# Altium PCB QS30.PcbDoc (part 2 of 2)
Units mil, origin at the board's own origin, x right, y up, seen from the top; angles counter-clockwise.
Board outline 3448.82 x 1825 mil, 2 copper layers (Top Layer, Bottom Layer); 106 components, 114 nets, 350 pads, 148 vias.
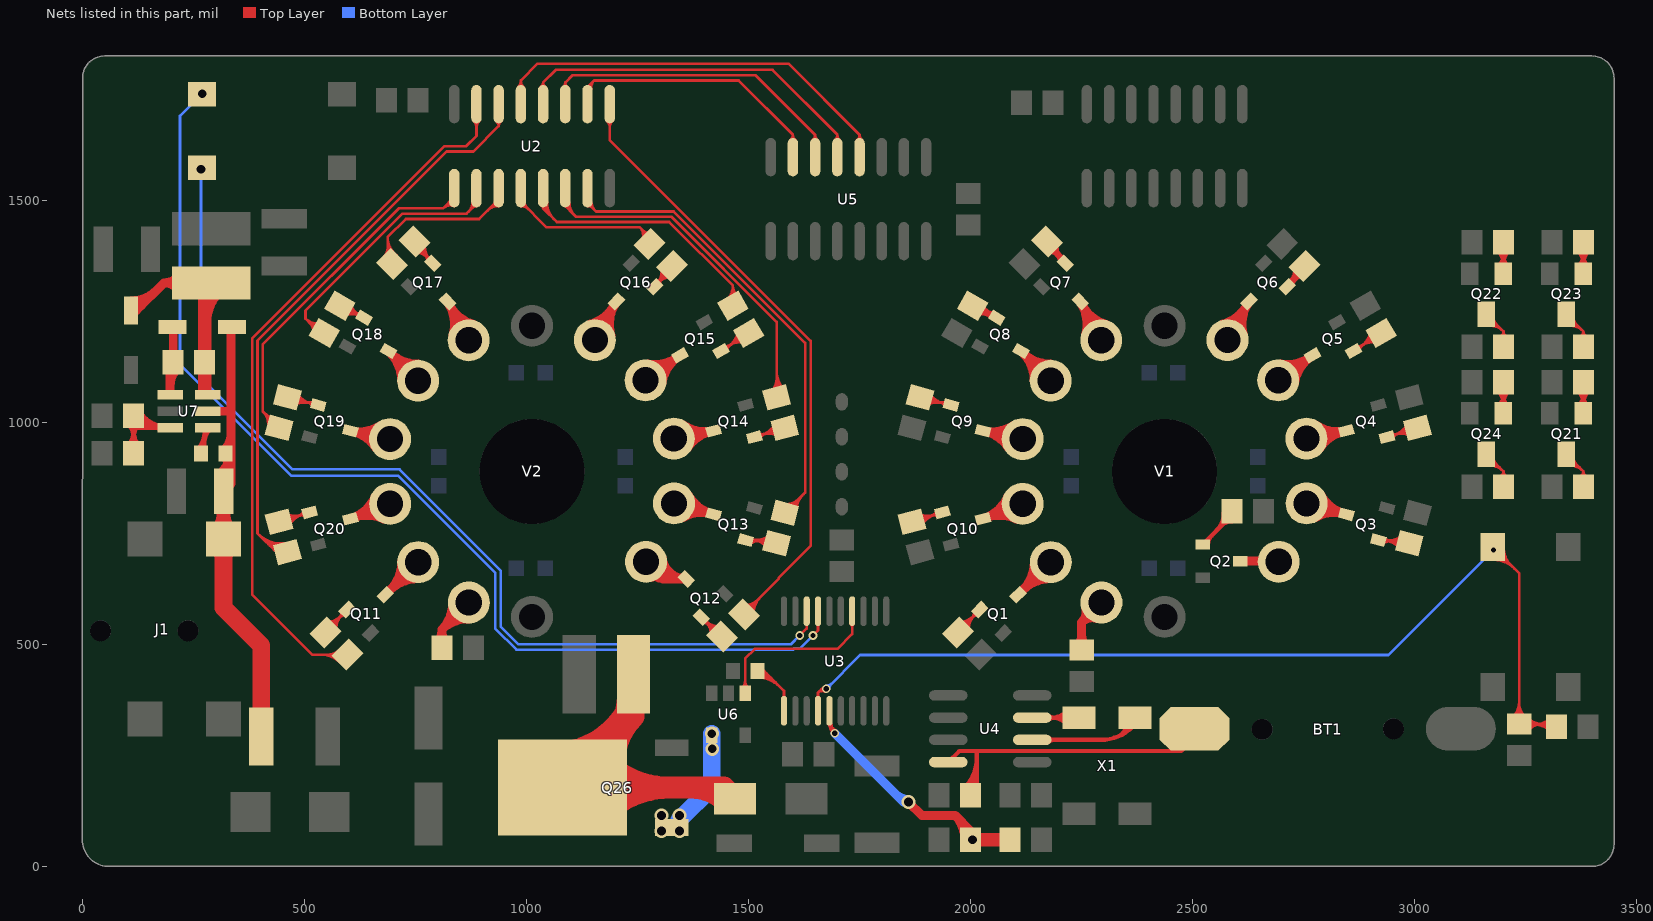
[diagram p2: the nets of this part, all layers, seen from the top]

## Via types
v1: diameter 31.5, hole 19.68, Top Layer to Bottom Layer, tented both sides, 87 vias
v2: diameter 19.68, hole 19.68, Top Layer to Bottom Layer, 32 vias
v3: diameter 19.68, hole 11.81, Top Layer to Bottom Layer, tented both sides, 25 vias
v4: diameter 196.85, hole 137.8, Top Layer to Bottom Layer, 4 vias

## Nets (pads, with @x,y where several pads share a name; then routed paths per layer and width w, separated by ;. In a path a pad name is that pad's centre, name@x,y a point inside that pad or via, vN(x,y) a via of type N, cw(c..) or ccw(c..) an arc to the next point about the centre after c; other vN are vias at no path point) (continued)
N2_0: R13.2 U2.15 | length 1772.1
  Top Layer w6: 538.13,476.83 cw(c538.13,417.54) R13.2@580.05,459.47 ; 551.57,476.83 ccw(c551.57,517.12) R13.2@580.05,488.63 ; 552.61,476.83 cw(c552.61,432.03) R13.2@584.29,463.71 ; R13.2@566.05,476.83 ccw(c566.05,502.63) R13.2@584.29,484.39 ; R13.2@567.1,476.83 cw(c567.1,446.51) R13.2@588.54,467.95 ; R13.2@597.42,476.83 517.42,476.83 382.36,611.89 382.36,1188.86 815.39,1621.89 864.36,1621.89 887.36,1644.89 887.36,1671.89 ; U2.15@881.13,1678.65 cw(c866.09,1663.61) 887.36,1663.61 cw(c908.63,1663.61) U2.15@893.59,1678.65 ; U2.15@884.1,1676.7 cw(c882.19,1671.89) 887.36,1671.89 ; U2.15@890.62,1676.7 ccw(c892.53,1671.89) 887.36,1671.89
N2_1: R14.2 U2.9 | length 1596.3
  Top Layer w6: U2.9@1181.13,1678.65 cw(c1166.09,1663.61) 1187.36,1663.61 cw(c1208.63,1663.61) U2.9@1193.59,1678.65 ; U2.9@1187.36,1716.38 1187.36,1635.83 1639.88,1183.31 1639.88,721.85 1567.72,649.69 1567.72,647.72 1489.88,569.88 R14.2@1489.88,557.52 ; R14.2@1489.94,582.2 ccw(c1489.94,611.8) 1510.87,590.87 ; R14.2@1489.94,588.2 ccw(c1489.94,632.28) 1521.11,601.11 ; R14.2@1498.56,567.57 cw(c1525.08,567.57) 1506.33,586.33 ; R14.2@1504.56,567.57 cw(c1545.56,567.57) 1516.57,596.57 ; R14.2@1510.56,567.57 cw(c1566.05,567.57) 1526.81,606.81
N2_2: R15.2 U2.7 | length 1248.3
  Top Layer w6: U2.7@1137.36,1487.09 cw(c1137.36,1470.69) 1148.96,1482.29 ; U2.7@1137.36,1527.4 1137.36,1493.89 1156.36,1474.89 1331.33,1474.89 1627.36,1178.86 1627.36,841.94 R15.2@1581.53,796.12 ; U2.7@1146.17,1495.91 ccw(c1172.31,1495.91) 1153.83,1477.42 ; R15.2@1585.34,809.72 ccw(c1585.34,833.38) 1602.07,816.65 ; R15.2@1585.34,815.72 ccw(c1585.34,853.86) 1612.31,826.89 ; R15.2@1593.96,795.1 cw(c1626.41,795.1) 1603.46,818.05 ; R15.2@1599.96,795.1 cw(c1646.9,795.1) 1613.71,828.29 ; R15.2@1605.96,795.1 cw(c1667.38,795.1) 1623.95,838.53
N2_3: R16.2 U2.6 | length 1010.8
  Top Layer w6: U2.6@1087.36,1527.4 1087.36,1486.89 1111.36,1462.89 1326.36,1462.89 1563.19,1226.06 R16.2@1563.19,1056.12 ; U2.6@1090.17,1495.91 ccw(c1118.73,1495.91) 1098.54,1475.72 ; U2.6@1096.17,1495.91 ccw(c1139.21,1495.91) 1108.78,1465.47 ; R16.2@1552.41,1071.72 ccw(c1526.39,1097.74) 1563.19,1097.74 ; R16.2@1556.65,1067.47 ccw(c1540.87,1083.25) 1563.19,1083.25 ; 1563.19,1087.13 ccw(c1596.99,1087.13) R16.2@1573.09,1063.23 ; 1563.19,1101.62 ccw(c1611.48,1101.62) R16.2@1577.33,1067.47 ; 1563.19,1116.1 ccw(c1625.96,1116.1) R16.2@1581.58,1071.72
N2_4: R17.2 U2.5 | length 803.8
  Top Layer w6: U2.5@1033.54,1487.97 cw(c1030.62,1481.89) 1037.36,1481.89 ; U2.5@1034.17,1495.91 ccw(c1060.31,1495.91) 1041.83,1477.42 ; U2.5@1037.36,1527.4 1037.36,1481.89 ; U2.5@1040.17,1495.91 ccw(c1080.8,1495.91) 1052.07,1467.18 ; U2.5@1041.18,1487.97 ccw(c1044.1,1481.89) 1037.36,1481.89 ; U2.5@1046.17,1495.91 ccw(c1101.28,1495.91) 1062.31,1456.94 ; R17.2@1453.47,1279.13 ccw(c1426.5,1306.1) 1464.65,1306.1 ; R17.2@1457.72,1274.88 ccw(c1440.99,1291.61) 1464.65,1291.61 ; R17.2@1464.65,1262.58 1464.65,1307.64 ; 1464.65,1296.88 ccw(c1488.02,1296.88) R17.2@1475.74,1276.98 ; R17.2@1478.89,1282.09 cw(c1494.67,1307.63) 1464.65,1307.63 ; 1037.36,1481.89 1068.36,1450.89 1321.39,1450.89 1464.65,1307.64
N2_5: R18.2 U2.4 | length 494.8
  Top Layer w6: U2.4@987.36,1487.09 cw(c987.36,1463.45) 1004.08,1480.17 ; U2.4@987.36,1527.4 987.36,1496.89 1045.36,1438.89 1255.36,1438.89 ; U2.4@996.17,1495.91 ccw(c1015.07,1495.91) 1001.71,1482.54 ; R18.2@1260.9,1412.28 ccw(c1237.83,1421.36) 1255.36,1438.89 ; 1260.99,1433.26 ccw(c1280.09,1452.37) R18.2@1280.09,1425.35 ; 1261.84,1432.42 cw(c1247.12,1417.7) R18.2@1266.48,1410.08 ; R18.2@1268.31,1425.94 cw(c1256.41,1414.05) R18.2@1272.07,1407.89 ; R18.2@1287.31,1406.94 1255.36,1438.89
N2_6: R19.2 U2.3 | length 555.9
  Top Layer w6: R19.2@679.94,1374.2 ccw(c662.16,1391.98) 687.31,1391.98 ; R19.2@687.31,1356.83 687.31,1416.83 ; 687.31,1392.17 ccw(c720.05,1392.17) R19.2@699.84,1366.4 ; 687.31,1404.5 ccw(c729.73,1404.5) R19.2@703.55,1371.12 ; R19.2@707.25,1375.84 cw(c739.4,1416.83) 687.31,1416.83 ; 912.1,1476.63 cw(c937.36,1451.38) U2.3@937.36,1487.09 ; 922.35,1486.88 cw(c937.36,1471.86) U2.3@937.36,1493.09 ; 926.55,1491.08 ccw(c921.73,1495.91) U2.3@928.55,1495.91 ; U2.3@937.36,1527.4 937.36,1501.89 893.36,1457.89 728.36,1457.89 687.31,1416.83
N2_7: R20.2 U2.2 | length 744.5
  Top Layer w6: 510.14,1225.7 ccw(c531.7,1247.26) R20.2@538.15,1217.46 ; 512.08,1223.77 cw(c491.49,1203.17) R20.2@520.61,1203.17 ; 517.93,1217.92 ccw(c534.47,1234.47) R20.2@539.41,1211.6 ; R20.2@534.65,1201.2 502.36,1233.49 ; R20.2@536.88,1223.33 cw(c528.94,1260.06) 502.36,1233.49 ; 869.48,1474.01 ccw(c847.58,1495.91) U2.2@878.55,1495.91 ; 879.18,1483.7 cw(c887.36,1475.52) U2.2@887.36,1487.09 ; 879.72,1484.25 ccw(c868.07,1495.91) U2.2@884.55,1495.91 ; U2.2@887.36,1527.4 887.36,1491.89 865.36,1469.89 720.36,1469.89 502.36,1251.89 502.36,1233.49
N2_8: R21.2 U2.1 | length 997.1
  Top Layer w6: 408.94,1021.92 ccw(c439.39,1052.37) R21.2@439.39,1009.3 ; 415.5,1015.35 cw(c392.75,992.6) R21.2@424.82,989.91 ; R21.2@418.84,990.41 ccw(c375.88,994.01) 406.36,1024.49 ; 419.18,1011.68 ccw(c439.39,1031.88) R21.2@439.39,1003.3 ; R21.2@443.19,987.66 406.36,1024.49 ; 819.42,1488.95 cw(c831.53,1476.84) U2.1@836.54,1493.22 ; U2.1@834.79,1487.48 ccw(c828.22,1466.03) 812.36,1481.89 ; U2.1@837.36,1486.89 U2.1@837.36,1527.4 837.36,1506.89 812.36,1481.89 ; 406.36,1024.49 406.36,1175.89 712.36,1481.89 812.36,1481.89
N2_9: R22.2 U2.14 | length 1580.3
  Top Layer w6: 403.54,740.71 ccw(c451.13,788.29) R22.2@456.55,721.22 ; 412.72,731.53 ccw(c452.5,771.31) R22.2@457.03,715.24 ; 421.9,722.36 ccw(c453.87,754.33) R22.2@457.52,709.26 ; 431.07,713.18 ccw(c455.25,737.35) R22.2@458,703.28 ; R22.2@456.07,727.2 cw(c449.75,805.27) 394.37,749.89 ; R22.2@461.53,707.66 436.59,707.66 394.36,749.89 ; U2.14@931.96,1677.92 cw(c923.4,1666.89) 937.36,1666.89 ; U2.14@937.36,1716.38 937.36,1666.89 ; U2.14@942.76,1677.92 ccw(c951.32,1666.89) 937.36,1666.89 ; 394.36,749.89 394.36,1183.89 820.36,1609.89 880.36,1609.89 937.36,1666.89
N2_A: U2.10 U5.7 | length 672.1
  Top Layer w6: U2.10@1137.36,1716.38 1137.36,1755 1151.88,1769.52 ; U2.10@1140.11,1748.45 cw(c1154.3,1751.44) 1144.05,1761.69 ; U2.10@1145.98,1749.69 cw(c1167.24,1754.16) 1151.88,1769.52 ; U5.7@1594.19,1635.23 ccw(c1583.77,1647.52) 1599.88,1647.52 ; U5.7@1599.88,1597.01 1599.88,1647.52 ; U5.7@1605.58,1635.23 cw(c1615.99,1647.52) 1599.88,1647.52 ; 1151.88,1769.52 1477.88,1769.52 1599.88,1647.52
N2_B: U2.13 U5.4 | length 1009.9
  Top Layer w6: U2.13@981.13,1754.1 ccw(c966.09,1769.15) 987.36,1769.15 ccw(c1008.63,1769.15) U2.13@993.59,1754.1 ; U2.13@987.36,1716.38 987.36,1770.04 1024.84,1807.52 1589.88,1807.52 1749.88,1647.52 ; U5.4@1744.19,1635.23 ccw(c1733.77,1647.52) 1749.88,1647.52 ; U5.4@1749.88,1597.01 1749.88,1647.52 ; U5.4@1755.58,1635.23 cw(c1765.99,1647.52) 1749.88,1647.52
N2_C: U2.12 U5.5 | length 885.2
  Top Layer w6: U2.12@1032.24,1755.04 ccw(c1025.13,1765) 1037.36,1765 ; U2.12@1037.36,1716.38 1037.36,1765 ; U2.12@1042.48,1755.04 cw(c1049.6,1765) 1037.36,1765 ; U5.5@1694.19,1635.23 ccw(c1683.77,1647.52) 1699.88,1647.52 ; U5.5@1699.88,1597.01 1699.88,1647.52 ; U5.5@1705.58,1635.23 cw(c1715.99,1647.52) 1699.88,1647.52 ; 1037.36,1765 1065.88,1793.52 1553.88,1793.52 1699.88,1647.52
N2_D: U2.11 U5.6 | length 775.2
  Top Layer w6: U2.11@1082.24,1755.04 ccw(c1075.13,1765) 1087.36,1765 ; U2.11@1087.36,1716.38 1087.36,1765 ; U2.11@1092.48,1755.04 cw(c1099.6,1765) 1087.36,1765 ; U5.6@1644.19,1635.23 ccw(c1633.77,1647.52) 1649.88,1647.52 ; U5.6@1649.88,1597.01 1649.88,1647.52 ; U5.6@1655.58,1635.23 cw(c1665.99,1647.52) 1649.88,1647.52 ; 1087.36,1765 1103.88,1781.52 1515.88,1781.52 1649.88,1647.52
NetBT1_1: BT1.1 C2.1 U4.8 | length 911.2
  Top Layer w10: U4.8@1949.76,235 1974.76,260 2474.13,260 BT1.1@2534.06,319.92 ; C2.1@1986.52,177.1 ccw(c1919.56,244.06) 2014.25,244.06 ; C2.1@1993.59,170.03 ccw(c1943.7,219.92) 2014.25,219.92 ; C2.1@1999.68,160 2014.25,174.57 2014.25,260 ; C2.1@2000.66,162.96 ccw(c1967.84,195.78) 2014.25,195.78
  Top Layer w20: U4.8@1949.76,235 U4.8@1969.25,235
NetC8_1: C8.1 D4.2 L2.1 U7.6 | length 702.4
  Top Layer w20: D4.2@110,1251.93 121.93,1251.93 183.98,1313.98 ; D4.2@110,1253.43 ccw(c110,1285.84) 132.92,1262.92 ; D4.2@110,1273.43 ccw(c110,1354.12) 167.06,1297.06 ; L2.1@216.91,1297.52 ccw(c183.98,1272.8) 183.98,1313.98 ; L2.1@216.91,1330.43 cw(c183.98,1355.15) 183.98,1313.98 ; L2.1@290,1313.98 183.98,1313.98
  Top Layer w30: U7.6@275.43,1070 275.43,1299.41 L2.1@290,1313.98 ; 275.43,1224.73 cw(c379.25,1224.73) L2.1@305.84,1298.14
NetC8_2: C8.2 D2.2 U7.1 | length 200.6
  Top Layer w20: U7.1@197.68,1062.4 197.68,1128.11 C8.2@204.57,1135 204.57,1213.5 ccw(c203.07,1213.5) D2.2@203.07,1215 ; 197.68,1081.54 cw(c254.09,1081.54) C8.2@214.2,1121.43
NetD3_1: D3.1 L1.2 Q26.4 | length 1864.1
  Top Layer w50: Q26.4@1101.07,258.97 ccw(c1061.61,444.52) L1.2@1225.9,349.67 ; Q26.4@1118.39,260.79 ccw(c1118.39,371.52) 1196.68,293.22 ; Q26.4@1150.86,184.76 cw(c1244.08,205.54) Q26.4@1176.54,273.08 ; Q26.4@1177.26,118.64 cw(c1319.41,-23.51) 1319.41,177.52 cw(c1319.41,378.55) Q26.4@1177.26,236.4 ; Q26.4@1188.69,285.23 ccw(c1092.59,381.34) L1.2@1228.5,381.34 ; Q26.4@1198.82,199.07 cw(c1369.8,244.88) 1216.5,333.39 ; Q26.4@1199.66,195.64 cw(c1349.33,229) 1240.9,337.43 ; L1.2@1240.91,432.52 1240.91,337.44 ; 1371.82,177.52 cw(c1371.82,66.98) D3.1@1449.98,145.14 ; D3.1@1469.17,152.52 1444.17,177.52 Q26.4@1080.98,177.52 1240.91,337.44
NetQ1_1: Q1.1 R3.1 | length 237.9
  Top Layer w6: R3.1@1971.72,526.94 Q1.1@2020.4,578.41 ; R3.1@1973.93,550.34 ccw(c1972.55,599.74) 2008.45,565.78 ; R3.1@1974.09,544.34 ccw(c1973.12,579.26) 1998.5,555.26 ; R3.1@1989.12,530.13 cw(c2024.78,531.13) 1998.86,555.64 ; R3.1@1995.11,530.3 cw(c2045.26,531.7) 2008.81,566.16 ; 2002.17,559.14 ccw(c1986.38,574.08) Q1.1@2008.11,574.69 ; 2002.63,559.62 cw(c2017.74,545.33) Q1.1@2017.16,566.12
NetQ1_3: Q1.3 V1.3 | length 245.4
  Top Layer w20: Q1.3@2106.7,611.82 V1.3@2180.62,685.18 ; V1.3@2143.37,685.32 cw(c2053.46,685.66) 2116.8,621.84 cw(c2180.13,558.02) V1.3@2180.47,647.93
NetQ2_1: Q2.1 R4.1 | length 221
  Top Layer w10: Q2.1@2522.56,724.92 2588.82,791.18 R4.1@2588.82,800 ; Q2.1@2534.29,724.92 cw(c2562.62,724.92) 2542.59,744.95 ; 2553.58,755.94 ccw(c2513.45,796.06) R4.1@2570.2,796.06 ; 2565.36,767.73 cw(c2588.82,744.27) R4.1@2588.82,777.44 ; R4.1@2570.65,773.01 ccw(c2547.6,796.06) R4.1@2580.2,796.06
NetQ2_3: Q2.3 V1.13 | length 87.2
  Top Layer w20: Q2.3@2607.2,687.52 2692.06,687.52 cw(c2692.06,686) V1.13@2693.58,686
NetQ3_1: Q3.1 R5.1 | length 270.2
  Top Layer w6: Q3.1@2917.97,734.81 R5.1@2987.6,727.66 ; Q3.1@2928.29,726.7 cw(c2943.4,708.13) 2945.84,731.95 ; Q3.1@2928.39,740.28 ccw(c2944.31,759.23) 2946.6,734.59 ; Q3.1@2929.51,727.91 cw(c2942.82,716.87) 2941.22,734.09 ; Q3.1@2929.56,739.1 ccw(c2943.99,750.84) 2942.09,732.33 ; Q3.1@2932.71,733.3 ccw(c2938.01,784.95) R5.1@2970.78,744.68 ; 2935.71,732.99 cw(c2930.85,685.59) R5.1@2967.8,715.67 ; 2947.12,731.82 ccw(c2950.94,769.06) R5.1@2974.57,740.02 ; 2950.12,731.51 cw(c2946.73,698.52) R5.1@2972.46,719.45
NetQ3_3: Q3.3 V1.12 | length 234
  Top Layer w20: V1.12@2756.49,817.52 Q3.3@2845.89,792.84 ; V1.12@2774.87,785.13 cw(c2819.24,706.92) 2843.17,793.6 cw(c2867.09,880.27) V1.12@2788.89,835.9
NetQ4_1: Q4.1 R6.1 | length 238.8
  Top Layer w6: Q4.1@2937.33,966.72 R6.1@3005.94,987.66 ; Q4.1@2946.23,975.77 ccw(c2955.95,994.03) 2961.99,974.24 ; Q4.1@2949.86,963.85 cw(c2969.15,953.58) 2962.77,974.48 ; 2954.25,971.88 ccw(c2939.58,1019.94) R6.1@2983.93,996.33 ; 2954.88,972.07 cw(c2969.28,924.9) R6.1@2992.45,968.44 ; 2968.1,976.11 ccw(c2957.66,1010.32) R6.1@2989.23,993.51 ; 2968.73,976.3 cw(c2978.9,942.98) R6.1@2995.27,973.74
NetQ4_3: Q4.3 V1.11 | length 232.7
  Top Layer w20: V1.11@2756.14,963.31 Q4.3@2845.89,980.94 ; V1.11@2776.91,994.23 ccw(c2827.05,1068.87) 2844.37,980.64 ccw(c2861.7,892.41) V1.11@2787.06,942.54
NetQ5_1: Q5.1 R7.1 | length 241.5
  Top Layer w6: Q5.1@2862.13,1160.66 R7.1@2924.49,1201.2 ; Q5.1@2868.21,1171.74 ccw(c2872.44,1191.68) 2883.55,1174.59 ; Q5.1@2875.01,1161.29 cw(c2896.68,1156.7) 2884.61,1175.28 ; 2879.03,1171.65 ccw(c2851.51,1213.99) R7.1@2900.91,1203.51 ; 2879.87,1172.2 cw(c2906.62,1131.05) R7.1@2916.8,1179.06 ; 2891.17,1179.55 ccw(c2871.55,1209.74) R7.1@2906.77,1202.27 ; 2892.02,1180.09 cw(c2910.87,1151.09) R7.1@2918.05,1184.93
NetQ5_3: Q5.3 V1.10 | length 237
  Top Layer w20: V1.10@2692.6,1094.53 Q5.3@2770.12,1150.73 ; V1.10@2698.46,1131.31 ccw(c2712.62,1220.1) 2765.4,1147.3 ccw(c2818.17,1074.51) V1.10@2729.38,1088.66
NetQ6_1: Q6.1 R8.1 | length 294.4
  Top Layer w6: Q6.1@2713.15,1305.37 R8.1@2751.83,1351.83 ; Q6.1@2713.58,1317.12 ccw(c2706.44,1336.51) 2725.2,1327.85 ; Q6.1@2715.82,1317.62 ccw(c2714.03,1337.28) 2729.2,1324.65 ; Q6.1@2716.91,1309.89 ccw(c2677.71,1342.53) R8.1@2728.51,1347.17 ; Q6.1@2718.02,1311.22 cw(c2755.34,1280.15) R8.1@2750.92,1328.51 ; Q6.1@2718.12,1317.53 ccw(c2721.07,1334.67) 2731.11,1320.46 ; Q6.1@2724.89,1311.9 cw(c2745.42,1319.46) 2725.56,1328.63 ; Q6.1@2725.31,1307.35 cw(c2750.09,1303.08) 2735.59,1323.63 ; Q6.1@2725.4,1309.65 cw(c2748.11,1311.73) 2730.58,1326.32 ; 2726.18,1321.03 ccw(c2698.11,1344.39) R8.1@2734.48,1347.72 ; 2727.29,1322.36 cw(c2753.48,1300.55) R8.1@2750.37,1334.49
NetQ6_3: Q6.3 V1.9 | length 240.6
  Top Layer w20: V1.9@2568.27,1221.03 ccw(c2543.73,1307.53) 2622.25,1263.72 ccw(c2700.77,1219.91) V1.9@2614.27,1195.37 ; V1.9@2578.44,1185.2 Q6.3@2626.84,1271.96
NetQ7_1: Q7.1 R9.1 | length 297.8
  Top Layer w6: R9.1@2171.83,1406.94 Q7.1@2213.29,1358.26 ; R9.1@2172.97,1383.6 cw(c2169.08,1335.05) Q7.1@2206.16,1366.63 ; R9.1@2173.44,1389.59 cw(c2170.71,1355.47) 2196.77,1377.66 ; R9.1@2189.19,1402.99 ccw(c2225.44,1400.09) 2197.75,1376.51 ; 2189.9,1378.22 cw(c2173.86,1355.7) Q7.1@2201.12,1360.28 ; R9.1@2195.17,1402.52 ccw(c2245.86,1398.46) Q7.1@2207.15,1365.48 ; 2195.7,1378.91 cw(c2178.49,1364.25) Q7.1@2201.03,1362.45 ; 2196.93,1377.47 ccw(c2212.11,1390.39) Q7.1@2210.51,1370.53 ; 2197.24,1372.99 ccw(c2205.88,1385.12) Q7.1@2208.35,1370.43 ; 2199.01,1382.18 ccw(c2220.46,1392.64) Q7.1@2212.68,1370.07 ; 2200.61,1378.88 cw(c2183.83,1370.7) Q7.1@2201.48,1364.61
NetQ7_3: Q7.3 V1.7 | length 240.5
  Top Layer w20: Q7.3@2246.7,1271.96 V1.7@2294.16,1184.75 ; V1.7@2258.44,1195.29 ccw(c2172.2,1220.75) 2251.18,1263.73 ccw(c2330.16,1306.7) V1.7@2304.7,1220.47
NetQ8_1: Q8.1 R10.1 | length 294.6
  Top Layer w6: R10.1@2004.49,1262.58 Q8.1@2058.82,1235.44 ; R10.1@2012.53,1246.74 cw(c2023.96,1212.48) 2040.1,1244.79 ; R10.1@2014.43,1241.05 cw(c2030.45,1193.05) Q8.1@2053.06,1238.32 ; R10.1@2021.77,1265.24 ccw(c2054.48,1276.16) 2039.07,1245.3 ; R10.1@2027.46,1267.14 ccw(c2073.91,1282.65) Q8.1@2052.03,1238.83 ; 2033.48,1242.32 cw(c2029.15,1221.11) Q8.1@2047.21,1233.04 ; 2033.99,1242.21 ccw(c2038.17,1262.69) Q8.1@2049.7,1245.25 ; 2034.75,1247.46 ccw(c2044.71,1267.4) Q8.1@2051.77,1246.26 ; 2036.04,1246.82 cw(c2026.99,1228.7) Q8.1@2046.2,1235.11 ; 2036.22,1252.84 ccw(c2052.54,1271.27) Q8.1@2054.03,1246.7 ; 2039.76,1249.71 cw(c2027.87,1236.29) Q8.1@2045.76,1237.37
NetQ8_3: Q8.3 V1.6 | length 235.9
  Top Layer w20: Q8.3@2113.42,1160.73 V1.6@2180.29,1093.7 ; V1.6@2143.04,1093.75 ccw(c2053.13,1093.86) 2116.78,1157.36 ccw(c2180.44,1220.86) V1.6@2180.33,1130.95
NetQ9_1: Q9.1 R11.1 | length 238.8
  Top Layer w6: R11.1@1885.94,1056.12 Q9.1@1955.57,1038.97 ; R11.1@1897.31,1042.58 cw(c1915.72,1012.15) 1924.23,1046.69 ; R11.1@1900.42,1037.45 cw(c1926.33,994.62) 1938.29,1043.22 ; R11.1@1902.26,1062.66 ccw(c1932.23,1080.79) 1923.85,1046.78 ; R11.1@1907.39,1065.77 ccw(c1949.76,1091.39) 1937.92,1043.32 ; 1929.9,1045.29 ccw(c1935.07,1066.28) Q9.1@1946.26,1047.78 ; 1930.37,1045.18 cw(c1925.37,1024.85) Q9.1@1943.28,1035.68
NetQ9_3: Q9.3 V1.5 | length 232.7
  Top Layer w20: Q9.3@2027.65,980.94 V1.5@2117.17,962.28 ; V1.5@2086.01,941.87 ccw(c2010.8,892.6) 2029.14,980.63 ccw(c2047.48,1068.65) V1.5@2096.76,993.44
NetQ10_1: Q10.1 R12.1 | length 238.8
  Top Layer w6: R12.1@1867.6,776.12 Q10.1@1936.21,797.06 ; R12.1@1878.27,790.04 ccw(c1894.64,820.8) 1904.81,787.48 ; R12.1@1881.09,795.34 ccw(c1904.26,838.88) 1918.67,791.71 ; R12.1@1884.31,770.26 cw(c1915.88,753.46) 1905.44,787.67 ; R12.1@1889.61,767.45 cw(c1933.97,743.84) 1919.29,791.9 ; 1910.77,789.3 ccw(c1904.39,810.19) Q10.1@1923.68,799.93 ; 1911.55,789.54 cw(c1917.6,769.75) Q10.1@1927.32,788.01
NetQ10_3: Q10.3 V1.4 | length 237
  Top Layer w20: Q10.3@2027.65,782.84 V1.4@2117.28,816.49 ; V1.4@2083.37,831.89 cw(c2001.5,869.07) 2033.1,784.89 cw(c2064.71,700.71) V1.4@2101.88,782.58
NetQ11_1: Q11.1 R13.1 | length 237.9
  Top Layer w6: R13.1@547.31,526.94 Q11.1@595.99,578.41 ; R13.1@549.52,550.34 ccw(c548.14,599.74) 584.04,565.78 ; R13.1@549.68,544.34 ccw(c548.71,579.26) 574.09,555.26 ; R13.1@564.71,530.13 cw(c600.37,531.13) 574.45,555.64 ; R13.1@570.71,530.3 cw(c620.85,531.7) 584.41,566.16 ; 577.76,559.14 ccw(c561.97,574.08) Q11.1@583.7,574.69 ; 578.22,559.62 cw(c593.33,545.33) Q11.1@592.75,566.12
NetQ11_3: Q11.3 V2.3 | length 245.4
  Top Layer w20: Q11.3@682.29,611.82 V2.3@756.21,685.18 ; V2.3@718.96,685.32 cw(c629.05,685.66) 692.39,621.84 cw(c755.72,558.02) V2.3@756.06,647.93
NetQ12_1: Q12.1 R14.1 | length 237.9
  Top Layer w6: Q12.1@1393.36,561.15 R14.1@1444.83,512.46 ; Q12.1@1397.09,548.86 cw(c1397.69,527.13) 1412.63,542.92 ; Q12.1@1400.13,554.75 ccw(c1435.06,591.67) R14.1@1436.47,540.86 ; Q12.1@1401.2,553.73 cw(c1367.71,518.32) R14.1@1416.43,519.68 ; Q12.1@1405.65,557.91 ccw(c1426.45,558.49) 1412.15,543.37 ; 1410.65,544.79 ccw(c1435.63,571.2) R14.1@1436.64,534.87 ; 1411.72,543.78 cw(c1388.18,518.89) R14.1@1422.43,519.84
NetQ12_3: Q12.3 V2.13 | length 382.1
  Top Layer w20: V2.13@1266.46,685.51 ccw(c1312.05,693.77) 1312.05,647.45 ; V2.13@1269.17,686 1307.73,647.45 ; V2.13@1284.13,651.89 cw(c1292.68,632.4) 1307.73,647.45 ; V2.13@1286.14,689.08 ccw(c1336,698.12) 1336,647.45 ; V2.13@1303.28,671.04 ccw(c1322.78,662.5) 1307.73,647.45 ; V2.13@1305.82,692.65 ccw(c1359.95,702.46) Q12.3@1359.96,647.45 1307.73,647.45 ; Q12.3@1343.7,647.45 ccw(c1343.7,663.7) Q12.3@1355.19,652.21
NetQ13_1: Q13.1 R15.1 | length 253.5
  Top Layer w6: Q13.1@1493.56,734.81 1502.36,736.89 R15.1@1563.19,727.66 ; Q13.1@1499.98,731.27 cw(c1511.95,715.02) 1514.98,734.98 ; Q13.1@1503.54,726.44 cw(c1524.1,698.53) 1529.3,732.8 ; Q13.1@1505.41,738.76 ccw(c1511.75,743.43) Q13.1@1510.57,735.64 ; Q13.1@1509.06,735.87 ccw(c1516.75,786.57) R15.1@1547.16,745.29 ; 1511.14,735.56 cw(c1503.9,687.81) R15.1@1542.78,716.45 ; 1523.38,733.7 ccw(c1528.89,770.08) R15.1@1550.72,740.46 ; 1525.47,733.39 cw(c1520.4,699.96) R15.1@1547.62,720.01
NetQ13_3: Q13.3 V2.12 | length 234
  Top Layer w20: V2.12@1332.08,817.52 Q13.3@1421.48,792.84 ; V2.12@1350.46,785.13 cw(c1394.83,706.92) 1418.76,793.6 cw(c1442.68,880.27) V2.12@1364.48,835.9
NetQ14_1: Q14.1 R16.1 | length 238.8
  Top Layer w6: Q14.1@1512.92,966.72 R16.1@1581.53,987.66 ; Q14.1@1521.82,975.77 ccw(c1531.54,994.03) 1537.58,974.24 ; Q14.1@1525.45,963.85 cw(c1544.74,953.58) 1538.36,974.48 ; 1529.84,971.88 ccw(c1515.17,1019.94) R16.1@1559.53,996.33 ; 1530.47,972.07 cw(c1544.87,924.9) R16.1@1568.04,968.44 ; 1543.69,976.11 ccw(c1533.25,1010.32) R16.1@1564.82,993.51 ; 1544.32,976.3 cw(c1554.49,942.98) R16.1@1570.86,973.74
NetQ14_3: Q14.3 V2.11 | length 232.7
  Top Layer w20: V2.11@1331.73,963.31 Q14.3@1421.48,980.94 ; V2.11@1352.5,994.23 ccw(c1402.64,1068.87) 1419.96,980.64 ccw(c1437.29,892.41) V2.11@1362.65,942.54
NetQ15_1: Q15.1 R17.1 | length 241.5
  Top Layer w6: Q15.1@1437.72,1160.66 R17.1@1500.08,1201.2 ; Q15.1@1443.81,1171.74 ccw(c1448.03,1191.68) 1459.14,1174.59 ; Q15.1@1450.6,1161.29 cw(c1472.27,1156.7) 1460.2,1175.28 ; 1454.62,1171.65 ccw(c1427.1,1213.99) R17.1@1476.5,1203.51 ; 1455.46,1172.2 cw(c1482.21,1131.05) R17.1@1492.39,1179.06 ; 1466.77,1179.55 ccw(c1447.14,1209.74) R17.1@1482.37,1202.27 ; 1467.61,1180.09 cw(c1486.46,1151.09) R17.1@1493.64,1184.93
NetQ15_3: Q15.3 V2.10 | length 237
  Top Layer w20: V2.10@1268.19,1094.53 Q15.3@1345.71,1150.73 ; V2.10@1274.05,1131.31 ccw(c1288.21,1220.1) 1340.99,1147.3 ccw(c1393.76,1074.51) V2.10@1304.97,1088.66
NetQ16_1: Q16.1 R18.1 | length 227.5
  Top Layer w6: Q16.1@1288.74,1305.37 R18.1@1327.42,1351.83 ; Q16.1@1291.41,1317.62 ccw(c1289.62,1337.28) 1304.79,1324.65 ; Q16.1@1292.5,1309.89 ccw(c1253.3,1342.53) R18.1@1304.1,1347.17 ; Q16.1@1293.61,1311.22 cw(c1330.93,1280.15) R18.1@1326.51,1328.51 ; Q16.1@1300.99,1309.65 cw(c1323.7,1311.73) 1306.17,1326.32 ; 1301.77,1321.03 ccw(c1273.7,1344.39) R18.1@1310.07,1347.72 ; 1302.88,1322.36 cw(c1329.07,1300.55) R18.1@1325.96,1334.49
NetQ16_3: Q16.3 V2.9 | length 240.6
  Top Layer w20: V2.9@1143.86,1221.03 ccw(c1119.32,1307.53) 1197.84,1263.72 ccw(c1276.36,1219.91) V2.9@1189.86,1195.37 ; V2.9@1154.03,1185.2 Q16.3@1202.44,1271.96
NetQ17_1: Q17.1 R19.1 | length 231
  Top Layer w6: R19.1@747.42,1406.94 Q17.1@788.88,1358.26 ; R19.1@748.56,1383.6 cw(c744.67,1335.05) Q17.1@781.75,1366.63 ; R19.1@749.03,1389.59 cw(c746.3,1355.47) 772.36,1377.66 ; R19.1@764.78,1402.99 ccw(c801.03,1400.09) 773.34,1376.51 ; R19.1@770.76,1402.52 ccw(c821.45,1398.46) Q17.1@782.74,1365.48 ; 771.29,1378.91 cw(c754.08,1364.25) Q17.1@776.62,1362.45 ; 772.52,1377.47 ccw(c787.7,1390.39) Q17.1@786.11,1370.53
NetQ17_3: Q17.3 V2.7 | length 240.5
  Top Layer w20: Q17.3@822.29,1271.96 V2.7@869.75,1184.75 ; V2.7@834.03,1195.29 ccw(c747.79,1220.75) 826.77,1263.73 ccw(c905.75,1306.7) V2.7@880.29,1220.47
NetQ18_1: Q18.1 R20.1 | length 227.8
  Top Layer w6: R20.1@580.08,1262.58 Q18.1@634.41,1235.44 ; R20.1@588.12,1246.74 cw(c599.55,1212.48) 615.69,1244.79 ; R20.1@590.02,1241.05 cw(c606.04,1193.05) Q18.1@628.65,1238.32 ; R20.1@597.36,1265.24 ccw(c630.07,1276.16) 614.66,1245.3 ; R20.1@603.05,1267.14 ccw(c649.5,1282.65) Q18.1@627.62,1238.83 ; 610.34,1247.46 ccw(c620.3,1267.4) Q18.1@627.36,1246.26 ; 611.63,1246.82 cw(c602.58,1228.7) Q18.1@621.79,1235.11
NetQ18_3: Q18.3 V2.6 | length 235.9
  Top Layer w20: Q18.3@689.01,1160.73 V2.6@755.88,1093.7 ; V2.6@718.63,1093.75 ccw(c628.72,1093.86) 692.37,1157.36 ccw(c756.03,1220.86) V2.6@755.92,1130.95
NetQ19_1: Q19.1 R21.1 | length 238.8
  Top Layer w6: R21.1@461.53,1056.12 Q19.1@531.16,1038.97 ; R21.1@472.9,1042.58 cw(c491.31,1012.15) 499.82,1046.69 ; R21.1@476.01,1037.45 cw(c501.92,994.62) 513.89,1043.22 ; R21.1@477.85,1062.66 ccw(c507.82,1080.79) 499.44,1046.78 ; R21.1@482.98,1065.77 ccw(c525.35,1091.39) 513.51,1043.32 ; 505.49,1045.29 ccw(c510.66,1066.28) Q19.1@521.85,1047.78 ; 505.96,1045.18 cw(c500.96,1024.85) Q19.1@518.87,1035.68
NetQ19_3: Q19.3 V2.5 | length 232.7
  Top Layer w20: Q19.3@603.24,980.94 V2.5@692.76,962.28 ; V2.5@661.6,941.87 ccw(c586.39,892.6) 604.73,980.63 ccw(c623.07,1068.65) V2.5@672.35,993.44
NetQ20_1: Q20.1 R22.1 | length 238.8
  Top Layer w6: R22.1@443.19,776.12 Q20.1@511.8,797.06 ; R22.1@453.86,790.04 ccw(c470.23,820.8) 480.4,787.48 ; R22.1@456.68,795.34 ccw(c479.85,838.88) 494.26,791.71 ; R22.1@459.9,770.26 cw(c491.47,753.46) 481.03,787.67 ; R22.1@465.2,767.45 cw(c509.56,743.84) 494.88,791.9 ; 486.36,789.3 ccw(c479.98,810.19) Q20.1@499.27,799.93 ; 487.14,789.53 cw(c493.19,769.75) Q20.1@502.91,788.01
NetQ20_3: Q20.3 V2.4 | length 237
  Top Layer w20: Q20.3@603.24,782.84 V2.4@692.87,816.49 ; V2.4@658.96,831.89 cw(c577.09,869.07) 608.7,784.89 cw(c640.3,700.71) V2.4@677.47,782.58
NetQ21_1: Q21.1 R23.2 | length 400
  Top Layer w6: R23.2@3365.1,1071.48 cw(c3329.9,1036.28) 3379.69,1036.28 cw(c3429.47,1036.28) R23.2@3394.27,1071.48 ; Q21.1@3367.45,1037.51 ccw(c3337.93,1067.04) R23.2@3379.69,1067.04 ; R23.2@3369.35,1075.72 cw(c3344.38,1050.76) 3379.69,1050.76 cw(c3414.99,1050.76) R23.2@3390.02,1075.72 ; R23.2@3370.37,1067.66 cw(c3365.16,1057.38) 3376.3,1054.4 cw(c3394.42,1049.54) R23.2@3387.4,1066.94 ; R23.2@3371.66,1067.07 cw(c3364.38,1049.85) 3382.43,1054.69 cw(c3392.92,1057.5) R23.2@3388.36,1067.35 ; Q21.1@3371.7,1033.26 ccw(c3352.41,1052.55) 3379.69,1052.55 ; R23.2@3373.08,1073.02 cw(c3368.57,1064.12) 3378.21,1061.53 ; Q21.1@3379.25,1020 3379.69,1020.43 R23.2@3379.69,1090 ; 3379.69,1050.46 ccw(c3404,1050.46) Q21.1@3386.81,1033.26 ; R23.2@3379.69,1064.94 ccw(c3418.49,1064.94) Q21.1@3391.05,1037.51 ; 3380.59,1061.58 cw(c3389.88,1064.07) R23.2@3385.83,1072.8
NetQ21_3: Q21.3 R27.2 | length 226.6
  Top Layer w6: Q21.3@3341.25,928.19 3379.69,889.76 ; Q21.3@3341.81,914.29 cw(c3344.75,889.75) 3362.22,907.22 ; Q21.3@3342.52,908.33 cw(c3346.61,874.15) 3370.95,898.49 ; Q21.3@3343.23,902.37 cw(c3348.48,858.55) 3379.68,889.76 ; Q21.3@3357.94,918.94 ccw(c3375.88,918.94) 3363.19,906.25 ; R27.2@3371.82,878 ccw(c3366.97,889.75) 3379.69,889.75 ; R27.2@3379.69,855 3379.69,889.76 ; R27.2@3387.55,878 cw(c3392.4,889.75) 3379.69,889.75
NetQ22_1: Q22.1 R24.2 | length 400
  Top Layer w6: R24.2@3185.1,1386.48 cw(c3149.9,1351.28) 3199.69,1351.28 cw(c3249.47,1351.28) R24.2@3214.27,1386.48 ; Q22.1@3187.45,1352.51 ccw(c3157.93,1382.04) R24.2@3199.69,1382.04 ; R24.2@3189.35,1390.72 cw(c3164.38,1365.76) 3199.69,1365.76 cw(c3234.99,1365.76) R24.2@3210.02,1390.72 ; R24.2@3190.37,1382.66 cw(c3185.16,1372.38) 3196.3,1369.4 cw(c3214.42,1364.54) R24.2@3207.4,1381.94 ; R24.2@3191.66,1382.07 cw(c3184.38,1364.85) 3202.43,1369.69 cw(c3212.92,1372.5) R24.2@3208.36,1382.35 ; Q22.1@3191.7,1348.26 ccw(c3172.41,1367.55) 3199.69,1367.55 ; R24.2@3193.08,1388.02 cw(c3188.57,1379.12) 3198.21,1376.53 ; Q22.1@3199.25,1335 3199.69,1335.43 R24.2@3199.69,1405 ; 3199.69,1365.46 ccw(c3224,1365.46) Q22.1@3206.81,1348.26 ; R24.2@3199.69,1379.94 ccw(c3238.49,1379.94) Q22.1@3211.05,1352.51 ; 3200.59,1376.58 cw(c3209.88,1379.07) R24.2@3205.83,1387.8
NetQ22_3: Q22.3 R28.2 | length 226.6
  Top Layer w6: Q22.3@3161.25,1243.19 3199.69,1204.76 ; Q22.3@3161.81,1229.29 cw(c3164.75,1204.75) 3182.22,1222.22 ; Q22.3@3162.52,1223.33 cw(c3166.61,1189.15) 3190.95,1213.49 ; Q22.3@3163.23,1217.37 cw(c3168.48,1173.55) 3199.68,1204.76 ; Q22.3@3177.94,1233.94 ccw(c3195.88,1233.94) 3183.19,1221.25 ; R28.2@3191.82,1193 ccw(c3186.97,1204.75) 3199.69,1204.75 ; R28.2@3199.69,1170 3199.69,1204.76 ; R28.2@3207.55,1193 cw(c3212.4,1204.75) 3199.69,1204.75
NetQ23_1: Q23.1 R25.2 | length 400
  Top Layer w6: R25.2@3365.1,1386.48 cw(c3329.9,1351.28) 3379.69,1351.28 cw(c3429.47,1351.28) R25.2@3394.27,1386.48 ; Q23.1@3367.45,1352.51 ccw(c3337.93,1382.04) R25.2@3379.69,1382.04 ; R25.2@3369.35,1390.72 cw(c3344.38,1365.76) 3379.69,1365.76 cw(c3414.99,1365.76) R25.2@3390.02,1390.72 ; R25.2@3370.37,1382.66 cw(c3365.16,1372.38) 3376.3,1369.4 cw(c3394.42,1364.54) R25.2@3387.4,1381.94 ; R25.2@3371.66,1382.07 cw(c3364.38,1364.85) 3382.43,1369.69 cw(c3392.92,1372.5) R25.2@3388.36,1382.35 ; Q23.1@3371.7,1348.26 ccw(c3352.41,1367.55) 3379.69,1367.55 ; R25.2@3373.08,1388.02 cw(c3368.57,1379.12) 3378.21,1376.53 ; Q23.1@3379.25,1335 3379.69,1335.43 R25.2@3379.69,1405 ; 3379.69,1365.46 ccw(c3404,1365.46) Q23.1@3386.81,1348.26 ; R25.2@3379.69,1379.94 ccw(c3418.49,1379.94) Q23.1@3391.05,1352.51 ; 3380.59,1376.58 cw(c3389.88,1379.07) R25.2@3385.83,1387.8
NetQ23_3: Q23.3 R29.2 | length 226.6
  Top Layer w6: Q23.3@3341.25,1243.19 3379.69,1204.76 ; Q23.3@3341.81,1229.29 cw(c3344.75,1204.75) 3362.22,1222.22 ; Q23.3@3342.52,1223.33 cw(c3346.61,1189.15) 3370.95,1213.49 ; Q23.3@3343.23,1217.37 cw(c3348.48,1173.55) 3379.68,1204.76 ; Q23.3@3357.94,1233.94 ccw(c3375.88,1233.94) 3363.19,1221.25 ; R29.2@3371.82,1193 ccw(c3366.97,1204.75) 3379.69,1204.75 ; R29.2@3379.69,1170 3379.69,1204.76 ; R29.2@3387.55,1193 cw(c3392.4,1204.75) 3379.69,1204.75
NetQ24_1: Q24.1 R26.2 | length 400
  Top Layer w6: R26.2@3185.1,1071.48 cw(c3149.9,1036.28) 3199.69,1036.28 cw(c3249.47,1036.28) R26.2@3214.27,1071.48 ; Q24.1@3187.45,1037.51 ccw(c3157.93,1067.04) R26.2@3199.69,1067.04 ; R26.2@3189.35,1075.72 cw(c3164.38,1050.76) 3199.69,1050.76 cw(c3234.99,1050.76) R26.2@3210.02,1075.72 ; R26.2@3190.37,1067.66 cw(c3185.16,1057.38) 3196.3,1054.4 cw(c3214.42,1049.54) R26.2@3207.4,1066.94 ; R26.2@3191.66,1067.07 cw(c3184.38,1049.85) 3202.43,1054.69 cw(c3212.92,1057.5) R26.2@3208.36,1067.35 ; Q24.1@3191.7,1033.26 ccw(c3172.41,1052.55) 3199.69,1052.55 ; R26.2@3193.08,1073.02 cw(c3188.57,1064.12) 3198.21,1061.53 ; Q24.1@3199.25,1020 3199.69,1020.43 R26.2@3199.69,1090 ; 3199.69,1050.46 ccw(c3224,1050.46) Q24.1@3206.81,1033.26 ; R26.2@3199.69,1064.94 ccw(c3238.49,1064.94) Q24.1@3211.05,1037.51 ; 3200.59,1061.58 cw(c3209.88,1064.07) R26.2@3205.83,1072.8
NetQ24_3: Q24.3 R30.2 | length 226.6
  Top Layer w6: Q24.3@3161.25,928.19 3199.69,889.76 ; Q24.3@3161.81,914.29 cw(c3164.75,889.75) 3182.22,907.22 ; Q24.3@3162.52,908.33 cw(c3166.61,874.15) 3190.95,898.49 ; Q24.3@3163.23,902.37 cw(c3168.48,858.55) 3199.68,889.76 ; Q24.3@3177.94,918.94 ccw(c3195.88,918.94) 3183.19,906.25 ; R30.2@3191.82,878 ccw(c3186.97,889.75) 3199.69,889.75 ; R30.2@3199.69,855 3199.69,889.76 ; R30.2@3207.55,878 cw(c3212.4,889.75) 3199.69,889.75
NetQ26_1: Q26.1 U6.4 | length 224.2
  Bottom Layer w40: v1@1344.25,105 1417.25,178 v1(1417.25,299)
  other v1: 1304.25,80 1344.25,80 1304.25,115 1344.25,115 1418.25,265
NetR1_2: R1.2 V1.2 | length 233.4
  Top Layer w20: R1.2@2240.37,497.07 ccw(c2217.11,520.32) 2250,520.32 ccw(c2282.89,520.32) R1.2@2259.63,497.07 ; R1.2@2250,505.43 2250,549.68 ; V1.2@2258.85,583.99 cw(c2225.35,574.33) 2250,549.69 ; V1.2@2284.31,558.53 ccw(c2274.65,525.04) 2250,549.69 ; V1.2@2294.63,594.32 2250,549.68
NetR2_2: R2.2 V2.2 | length 310.4
  Top Layer w20: R2.2@799.82,506.09 ccw(c776.56,529.34) 809.45,529.34 ccw(c842.34,529.34) R2.2@819.08,506.09 ; R2.2@809.45,492.52 809.45,533.54 V2.2@870.22,594.32 ; V2.2@833,593.11 cw(c752.51,590.49) 809.45,533.55 cw(c866.4,476.6) V2.2@869.01,557.09
NetR31_1: R31.1 U3.1 | length 296.4
  Top Layer w6: R31.1@1519.84,425.28 cw(c1519.84,353.16) 1570.84,404.16 ; R31.1@1519.84,431.28 cw(c1519.84,373.65) 1560.6,414.4 ; R31.1@1519.84,437.28 cw(c1519.84,394.13) 1550.36,424.64 ; R31.1@1519.84,440 1535,440 1579.72,395.28 U3.1@1579.72,350.32 ; R31.1@1519.84,443.28 cw(c1519.84,414.62) 1540.11,434.89 ; U3.1@1576.97,379.64 ccw(c1570.33,386.28) 1579.72,386.28 ccw(c1589.12,386.28) U3.1@1582.47,379.64
NetR35_1: R35.1 U7.4 | length 156.8
  Top Layer w10: R35.1@259.84,939.57 ccw(c223.24,976.17) 275,976.17 ; R35.1@266.91,932.5 ccw(c247.39,952.02) 275,952.02 ; R35.1@267.44,930 275,937.56 275,980.28 U7.4@282.32,987.6 ; 275,955.85 cw(c314.07,955.85) U7.4@286.44,983.48
NetR36_1: R36.1 R38.2 U7.3 | length 634.2
  Top Layer w10: R36.1@98.09,998.56 ccw(c119.51,1014) R36.1@119.51,987.6 ; R38.2@102.27,947.1 ccw(c70.48,978.89) 115.43,978.89 ; R36.1@102.27,997.9 cw(c70.48,966.11) 115.43,966.11 cw(c160.39,966.11) R36.1@128.6,997.9 ; R36.1@106.2,1004.41 ccw(c139.05,1028.1) R36.1@139.05,987.6 ; R36.1@114.32,1010.26 ccw(c158.59,1042.19) 158.59,987.6 ; R38.2@115.43,930 115.43,985 ; 115.43,978.89 ccw(c160.39,978.89) R38.2@128.6,947.1 ; R36.1@115.43,1015 115.43,985 ; R36.1@122.43,1016.11 ccw(c178.13,1056.28) U7.3@178.13,987.6 ; R36.1@130.54,1021.96 ccw(c197.67,1070.37) U7.3@197.68,987.6 118.03,987.6 115.43,985 ; U7.3@175.84,983.48 ccw(c165.89,973.53) 165.89,987.6 ccw(c165.89,1001.67) U7.3@175.84,991.72 ; 115.43,985 ccw(c106.51,985) 109.4,993.45 cw(c106.51,985) 115.43,985 ; 115.43,985 cw(c124.36,985) 121.47,993.45 ccw(c124.36,985) 115.43,985
NetU4_2: U4.2 X1.4 | length 357.4
  Top Layer w10: U4.2@2138.74,285 2293.81,285 ccw(c2293.81,385) 2364.53,314.29 X1.4@2380.24,330 ; U4.2@2175.05,280.18 cw(c2186.68,268.56) 2186.68,285 cw(c2186.68,301.44) U4.2@2175.05,289.82 ; 2337.58,295.91 ccw(c2320.84,320.46) X1.4@2348.55,331.18 ; 2347.99,303.01 ccw(c2332.91,325.13) X1.4@2357.87,334.79
NetU4_3: U4.3 X1.1 | length 221.5
  Top Layer w10: U4.3@2138.74,335 2249.25,335 X1.1@2254.25,330 ; U4.3@2175.05,330.18 cw(c2186.68,318.56) 2186.68,335 cw(c2186.68,351.44) U4.3@2175.05,339.82 ; X1.1@2217.88,320.44 ccw(c2182.73,285.29) 2182.73,335 ccw(c2182.73,384.71) X1.1@2217.88,349.56
NRST: C3.2 R32.1 S1.1 U3.4 | length 3026.4
  Top Layer w6: U3.4@1653.75,379.64 ccw(c1647.11,386.28) 1656.5,386.28 ccw(c1665.89,386.28) U3.4@1659.25,379.64 ; U3.4@1656.5,350.32 1656.5,391.5 ; 1662.32,397.32 cw(c1669.79,389.85) v3@1674.62,399.25 ; v3@1668.62,397.52 ccw(c1665,396.11) 1665,400 ; v3@1668.62,402.48 cw(c1665,403.89) 1665,400 ; v3@1671.88,393.91 ccw(c1665.84,382.15) 1656.5,391.5 ; v3(1675,400) 1665,400 ; S1.1@3172.41,713.36 ccw(c3182.55,711.64) S1.1@3179.91,701.71 ; S1.1@3172.97,710.03 ccw(c3190.59,719.63) S1.1@3185.43,700.24 ; S1.1@3176.06,690.73 cw(c3176.06,621.94) 3224.7,670.58 ; S1.1@3176.06,696.73 cw(c3176.06,642.42) 3214.46,680.83 ; S1.1@3176.06,702.73 cw(c3176.06,662.91) 3204.22,691.07 ; S1.1@3176.06,719.23 3235,660.28 R32.1@3235,320.43 3314.13,320.43 C3.2@3319.57,315 ; S1.1@3177.5,705.66 cw(c3177.5,676.38) S1.1@3198.2,697.08 ; S1.1@3177.5,711.66 cw(c3177.5,696.86) S1.1@3187.96,707.32 ; S1.1@3178.33,712.36 ccw(c3189.07,710.54) S1.1@3186.27,700.02 ; S1.1@3184.25,711.36 ccw(c3195.58,709.44) S1.1@3192.63,698.33 ; S1.1@3194.61,715.29 ccw(c3229.91,715.29) 3204.95,690.33 ; S1.1@3200.61,715.29 ccw(c3250.4,715.29) 3215.2,680.09 ; R32.1@3220.42,335.01 ccw(c3185.21,370.22) 3235,370.22 ccw(c3284.79,370.22) R32.1@3249.58,335.01 ; R32.1@3224.66,330.77 ccw(c3199.7,355.73) 3235,355.73 ccw(c3270.3,355.73) R32.1@3245.34,330.77 ; R32.1@3249.28,310.09 cw(c3274.24,285.13) 3274.24,320.43 cw(c3274.24,355.73) R32.1@3249.28,330.77 ; R32.1@3253.52,305.85 cw(c3288.72,270.65) 3288.72,320.43 cw(c3288.72,370.22) R32.1@3253.52,335.01 ; 3266.17,320.43 cw(c3266.17,265.54) C3.2@3304.98,304.35 ; 3273.39,320.43 ccw(c3273.39,365.11) C3.2@3304.98,333.52 ; 3280.65,320.43 cw(c3280.65,280.02) C3.2@3309.23,308.6 ; 3287.88,320.43 ccw(c3287.88,350.63) C3.2@3309.23,329.28 ; 3295.14,320.43 cw(c3295.14,294.51) C3.2@3313.47,312.84 ; 1656.5,391.5 1665,400
  Bottom Layer w6: v3(1675,400) 1751,476 2941,476 v3(3177.5,712.5) ; v3@1675,406.84 ccw(c1675,423.36) 1686.68,411.68 ccw(c1698.36,400) v3@1681.84,400 ; v3@3170.66,712.5 cw(c3154.14,712.5) 3165.82,700.82 cw(c3177.5,689.14) v3@3177.5,705.66
PWM: U3.14 U6.1 | length 445.5
  Top Layer w6: U6.1@1485.36,401.61 ccw(c1468.64,418.33) 1492.28,418.33 ccw(c1515.93,418.33) U6.1@1499.21,401.61 ; U6.1@1492.28,389.76 1492.28,468.03 1514.25,490 1700,490 1733.27,523.27 U3.14@1733.27,574.72 ; U3.14@1730.52,545.4 cw(c1723.88,538.76) 1733.27,538.76 cw(c1742.66,538.76) U3.14@1736.02,545.4
USART_RX: S4.2 U3.17 | length 2468.2
  Top Layer w6: v3(1645,520) 1656.5,531.5 U3.17@1656.5,574.72
  Bottom Layer w6: v1(270,1740) 220,1690 220,1130 470,880 711,880 930,661 930,535 977,488 1599.97,488 1601.97,490 1615,490 v3(1645,520)
USART_TX: S3.2 U3.18 | length 2210
  Top Layer w6: v3(1615,520) 1630.91,535.91 U3.18@1630.91,574.72
  Bottom Layer w6: v1(267,1570) 267,1099.97 472.97,894 713.97,894 942,665.97 942,539.97 981.97,500 1595,500 v3(1615,520)
VDDA: C4.2 R33.2 U3.5 | length 750.4
  Top Layer w6: U3.5@1682.09,329.37 U3.5@1682.09,350.32
  Top Layer w10: U3.5@1681.14,322.1 cw(c1676.37,313.84) 1685.59,316.31 ; U3.5@1682.09,329.37 ccw(c1723.62,329.37) v3(1694.25,300) ; v3@1689.57,301.25 ccw(c1678.28,304.28) 1688.41,310.12 ccw(c1698.53,315.97) v3@1695.51,304.68
  Top Layer w20: v1(1860,145) 1890,115 1965,115 ; 1983.3,96.7 cw(c1946.61,60) C4.2@1998.5,60 ; C4.2@1986.06,63.97 ccw(c1914.16,64.15) 1965,115 ; C4.2@1999.69,60 C4.2@1999.69,80.31 ; C4.2@2000.02,63.89 ccw(c1991.3,71.93) C4.2@1999.69,80.31 ; C4.2@2007.64,64.64 cw(c2019.1,80.31) C4.2@1999.69,80.31 ; 1965,115 C4.2@1999.69,80.31
  Top Layer w30: C4.2@1999.69,60 R33.2@2088.82,60
  Bottom Layer w20: v3(1694.25,300) 1849.25,145 v1(1860,145) ; 1831.84,162.41 ccw(c1860,190.57) v1@1860,150.75
  other v1: 2004.25,60
VIN: C6.1 D2.1 F1.1 J1.1@317.76,737.24 R35.2 U7.5 | length 1385.3
  Top Layer w20: U7.5@282.32,1025 335,1025 ; C6.1@309.91,882.77 ccw(c249.34,943.34) R35.2@335,943.34 ; C6.1@318.15,845 335,861.85 335,1025 ; R35.2@318.49,923.97 cw(c278.65,884.12) C6.1@335,884.12 ; R35.2@318.49,936.03 ccw(c278.65,975.88) 335,975.88 ; C6.1@324.05,868.63 ccw(c297.62,895.06) C6.1@335,895.06 ; 335,1196.47 cw(c355.46,1196.47) D2.1@340.99,1210.94 ; D2.1@336.93,1215 335,1213.07 335,1025
  Top Layer w30: J1.1@300.52,754.48 ccw(c258.92,796.08) 317.76,796.08 ccw(c376.59,796.08) J1.1@334.99,754.48 ; J1.1@317.76,737.24 317.76,844.61 C6.1@318.15,845
  Top Layer w40: J1.1@304.06,723.55 cw(c270.99,690.48) 317.76,690.48 cw(c364.52,690.48) J1.1@331.45,723.55 ; J1.1@317.76,737.24 317.76,582.24 402.6,497.4 F1.1@402.6,292.52
pads on no net: BT1. J1.0 J1.1@140.59,737.24 U5.9 V1.0 V1.1 V1.8 V2.0 V2.1 V2.8 X1.2 X1.3
copper on no net:
  other v2: 108.27,25.27 3340.55,25.27 49.15,49.15 167.39,49.15 3281.43,49.15 3399.67,49.15 25.27,108.27 191.27,108.27 3257.55,108.27 3423.55,108.27 49.15,167.39 167.39,167.39 3281.43,167.39 3399.67,167.39 108.27,191.27 3340.55,191.27 108.27,1632 3340.55,1632 49.15,1655.88 167.39,1655.88 3281.43,1655.88 3399.67,1655.88 25.27,1715 191.27,1715 3257.55,1715 3423.55,1715 49.15,1774.12 167.39,1774.12 3281.43,1774.12 3399.67,1774.12 108.27,1798 3340.55,1798
  other v4: 108.27,108.27 3340.55,108.27 108.27,1715 3340.55,1715

## Polygon pours and split planes (outlines as drawn)
GND on Top Layer "Top Layer-No Net" (solid, remove dead copper, pour order 4): 220,1825 55.32,1825 ccw(c55.32,1770) 0.32,1770 0.32,50 ccw(c50.32,50) 50.32,0 3398.82,0 ccw(c3398.82,50) 3448.82,50 3448.82,1775 ccw(c3398.82,1775) 3398.82,1825
GND on Bottom Layer "Top Layer-No Net" (solid, remove dead copper, pour order 6): 290,1825 50.32,1825 ccw(c50.32,1775) 0.32,1775 0.32,50 ccw(c50.32,50) 50.32,0 3398.82,0 ccw(c3398.82,50) 3448.82,50 3448.82,1766.18 ccw(c3390,1766.18) 3390,1825

## Keep-outs
Keep-Out Layer:
  lines w10: 0,94.17 cw(c0.32,94.17) 0.32,94.49 ; 0.32,141.73 0.32,1724.41 0.32,1775 cw(c50.32,1775) 50.32,1825 80,1825 ; 0.32,188.98 0.32,50 ccw(c50.32,50) 50.32,0 263.78,0 ; 60,1825 3398.82,1825 cw(c3398.82,1775) 3448.82,1775 3448.82,1732.28 3448.82,157.48 ; 161.42,0 3398.82,0 ccw(c3398.82,50) 3448.82,50 3448.82,196.85 ; 3448.82,1338.58 3448.82,1745

## Other copper
Top Layer:
  rectangle net NetQ26_1: 1279.25,65 1369.25,130
  rectangle net 170V: 1579.25,30 1770,190
  rectangle net NetQ26_1: 1394.25,240 1439.25,320
  pour cut-out: 1020,1360 910,1350 840,1330 740,1270 670,1210 620,1150 570,1040 540,930 550,820 580,700 660,580 750,500 800,470 880,440 980,420 1050,420 1160,440 1280,500 1360,570 1430,670 1470,770 1480,880 1470,970 1460,1030 1400,1160 1300,1260 1220,1310 1120,1350
  pour cut-out: 2437,1359 2347,1350 2249,1325 2157,1273 2076,1190 2025,1117 2000,1060 1966,947 1966,908 1971,810 2000,715 2026,657 2084,578 2146,519 2244,459 2347,427 2462,419 2571,438 2680,485 2769,555 2842,649 2890,760 2905,835 2903,959 2864,1087 2814,1170 2754,1238 2689,1287 2604,1327 2523,1352 2440,1360
  pour cut-out: 2210,440 2210,375 2290,375 2290,440
  pour cut-out: 1140,540 1140,330 890,330 890,0 1870,0 1870,230 1300,230 1300,540
Bottom Layer:
  rectangle net NetQ26_1: 1279.25,65 1369.25,130
  rectangle net NetQ26_1: 1394.25,240 1439.25,320
  pour cut-out: 1020,1360 910,1350 840,1330 740,1270 670,1210 620,1150 570,1040 540,930 550,820 580,700 660,580 750,500 800,470 880,440 980,420 1050,420 1160,440 1280,500 1360,570 1430,670 1470,770 1480,880 1470,970 1460,1030 1400,1160 1300,1260 1220,1310 1120,1350
  pour cut-out: 2437,1359 2347,1350 2249,1325 2157,1273 2076,1190 2025,1117 2000,1060 1966,947 1966,908 1971,810 2000,715 2026,657 2084,578 2146,519 2244,459 2347,427 2462,419 2571,438 2680,485 2769,555 2842,649 2890,760 2905,835 2903,959 2864,1087 2814,1170 2754,1238 2689,1287 2604,1327 2523,1352 2440,1360
  pour cut-out: 2210,440 2210,375 2290,375 2290,440

## Silkscreen, mask and mechanical layers (free items; w line width, h text height)
Top Overlay:
  rectangle: 914.9,328 1060,345
  rectangle: 1220.6,-1.6 1412.6,58.8
  rectangle: 914.9,2 930,328
  rectangle: 1856,269 1881,304
  rectangle: 1550,285 1881,306
  rectangle: 1856,-1.6 1880.9,269
  rectangle: 1412.6,-1.6 1880.9,20.92
  text "T" at 570,1670 h30
  text "R" at 570,1500 h30
  text "SWDIO SWCLK" at 1680,830 h20 r90
  text "12V DC" at 75,230 h40
  text "By MartianZ" at 2660,200 h40
  text "Rev A" at 3100,30 h30
  text "HIGH VOLTAGE!" at 932,16 h40

## Text inside footprints (layer, text, board x,y; h text height)
C7: Top Overlay "+" at 1604.88,72.52 h39.37 r180
X1: Top Overlay "MC306" at 2291.5,291.69 h30 r270